# Altium PCB CT_V01.PcbDoc
Units mm, origin at the board's own origin, x right, y up, seen from the top; angles counter-clockwise.
Board outline 75 x 50 mm, 2 copper layers (Top Layer, Bottom Layer), stack 1.57 mm thick; 71 components, 48 nets, 226 pads, 77 vias.
Unrouted connection lines stored in the file: 61.
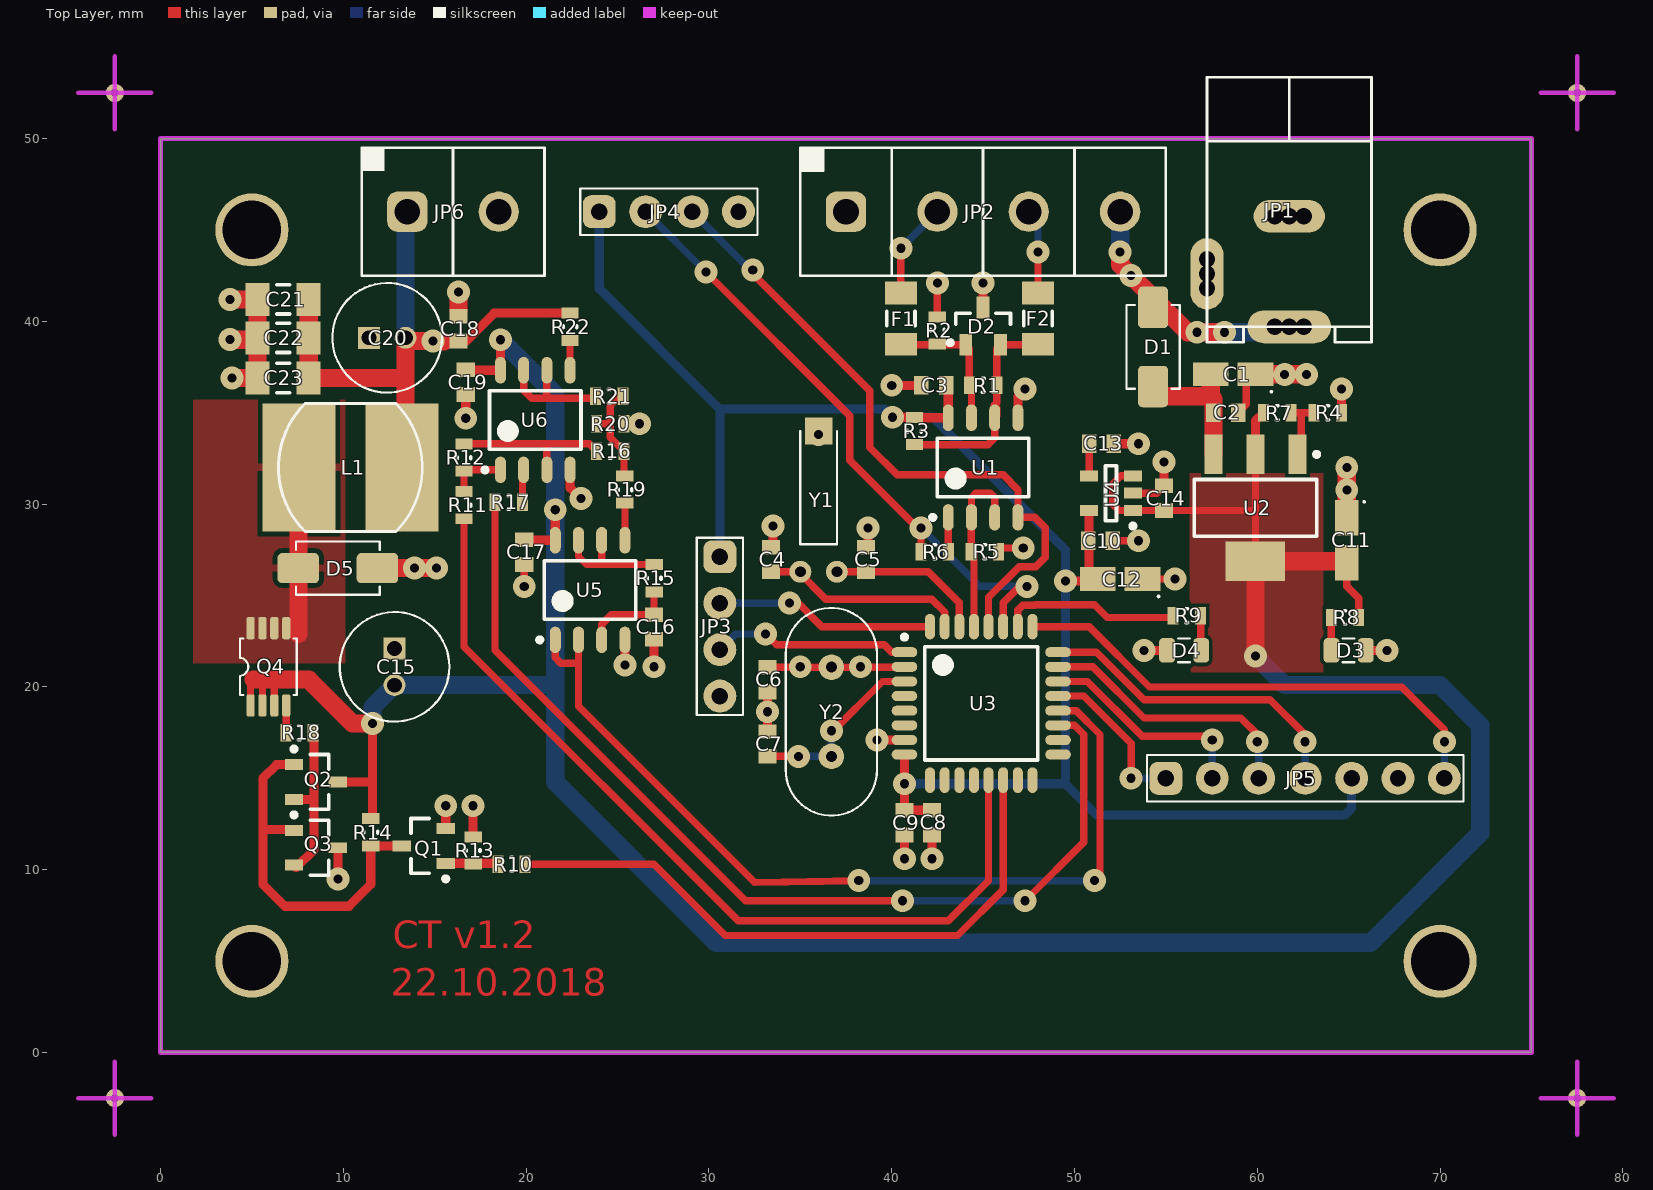
[diagram p0: Top Layer view]
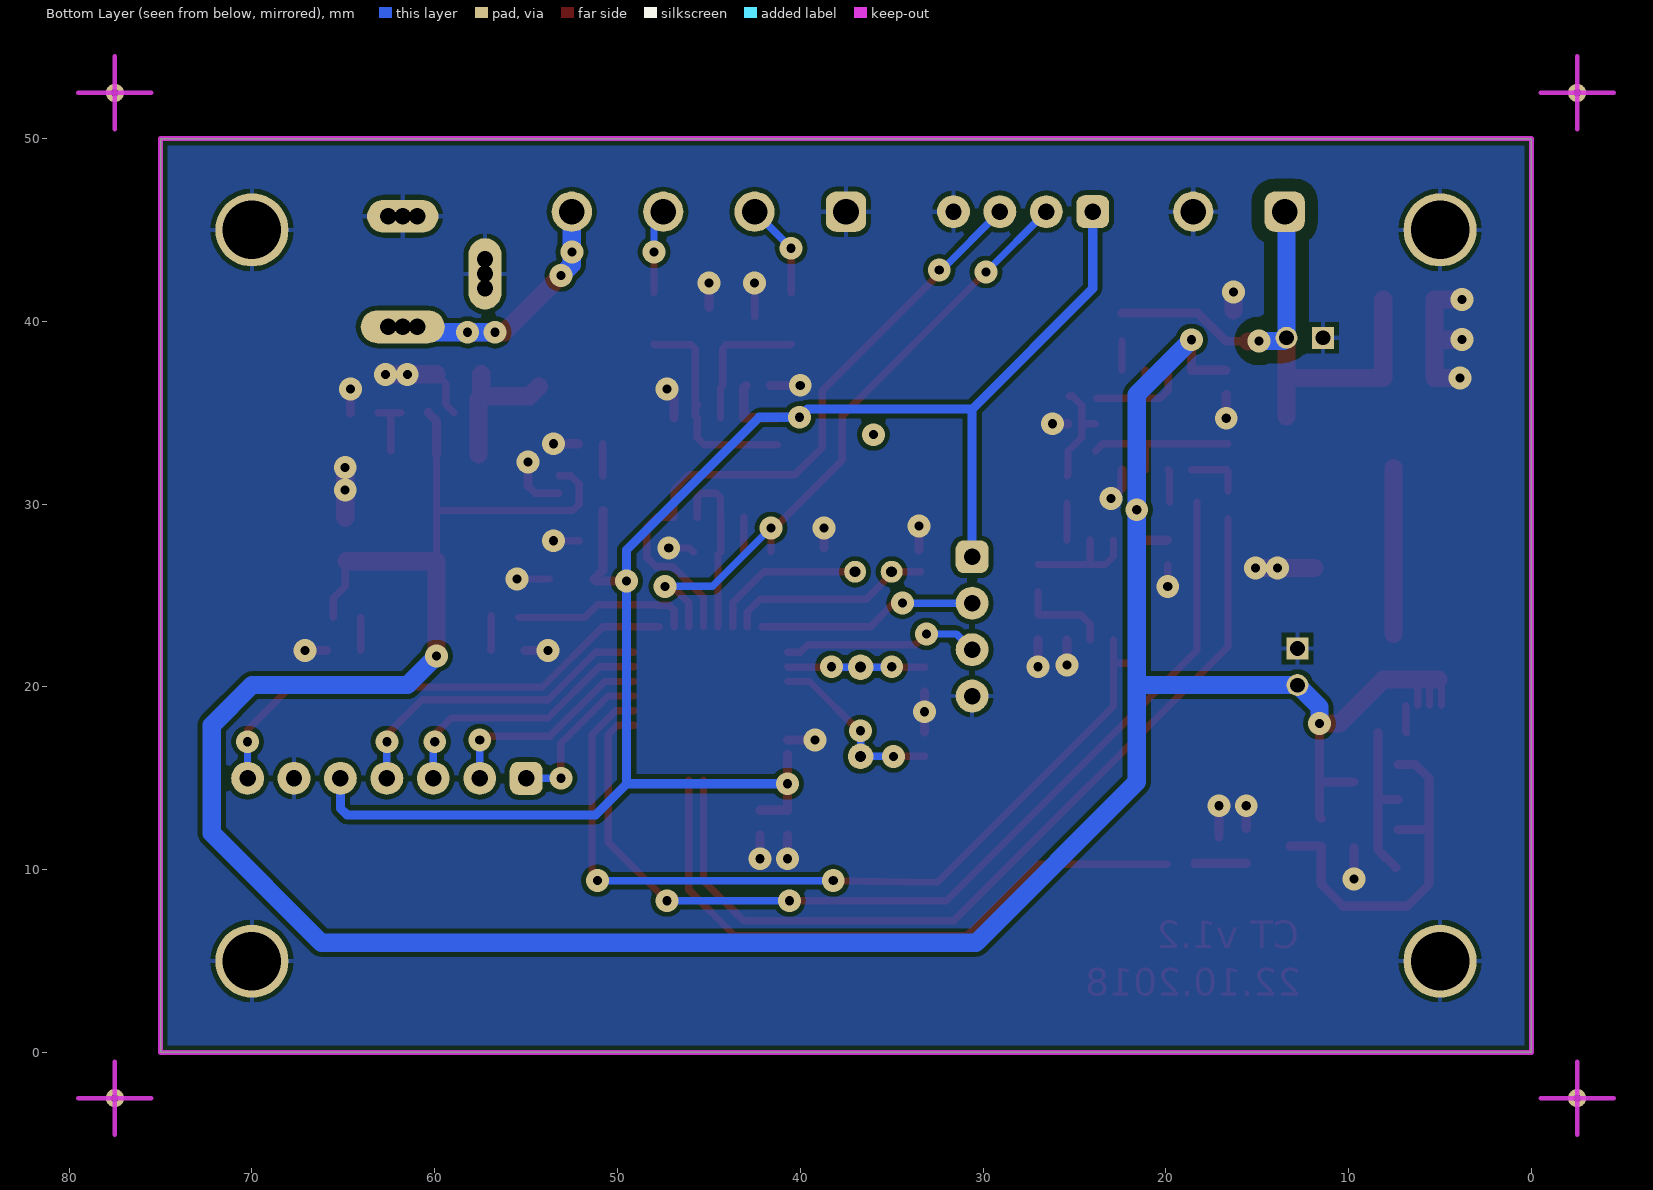
[diagram p1: Bottom Layer view, seen from below]

## Layer stack, top to bottom
Top Solder: solder mask 0.01, Solder Resist, Dk 3.5
Top Layer: signal copper 0.035
Dielectric 1: dielectric 1.5, FR-4, Dk 4.8
Bottom Layer: signal copper 0.035
Bottom Solder: solder mask 0.01, Solder Resist, Dk 3.5

## Board outline
0,0 75,0 75,50 0,50

## Design rules (kind name [scope] priority, off if disabled: settings)
Clearance Clearance_2 [InNamedPolygon('GND_B') vs InNet('NetC18_1')] p1: gap=0.7 ignorepadtopadclearanceinfootprint=FALSE
Clearance Clearance_1 [InNamedPolygon('GND_B')] p2: gap=0.254 ignorepadtopadclearanceinfootprint=FALSE except(0: Arc-Hole Track-Hole SMDPad-Hole THPad-Hole Via-Hole Fill-Hole Poly-Hole Region-Hole Text-Hole)
Clearance [All] p3: gap=0.2 ignorepadtopadclearanceinfootprint=FALSE
HoleSize [All] p1: absolutevalues=TRUE maxlimit=5 minlimit=0.025 maxpercent=80.000 minpercent=20.000
PlaneConnect [All] p1: planeconnectstyle=Relief reliefexpansion=0.5 reliefentries=4 reliefconductorwidth=0.3 reliefairgap=0.3
PolygonConnect PolygonConnect_6 [InComponent('U2') vs IsNamedPolygon('+6V')] p1: connectstyle=Direct reliefconductorwidth=0.254 reliefentries=4 polygonreliefangle="90 Angle" airgapwidth=0.254
PolygonConnect PolygonConnect_5 [IsVia vs IsNamedPolygon('+6V')] p2: connectstyle=Direct reliefconductorwidth=0.254 reliefentries=4 polygonreliefangle="90 Angle" airgapwidth=0.254
PolygonConnect PolygonConnect_4 [IsVia vs IsNamedPolygon('GND_B')] p3: connectstyle=Direct reliefconductorwidth=0.254 reliefentries=4 polygonreliefangle="90 Angle" airgapwidth=0.254
PolygonConnect PolygonConnect_3 [InComponent('D5') vs IsNamedPolygon('D5K')] p4: connectstyle=Relief reliefconductorwidth=0.4 reliefentries=4 polygonreliefangle="90 Angle" airgapwidth=0.25
PolygonConnect PolygonConnect_2 [InComponent('L1') vs IsNamedPolygon('D5K')] p5: connectstyle=Relief reliefconductorwidth=0.4 reliefentries=4 polygonreliefangle="90 Angle" airgapwidth=0.25
PolygonConnect PolygonConnect_1 [InComponent('Q4') vs IsNamedPolygon('D5K')] p6: connectstyle=Direct reliefconductorwidth=0.254 reliefentries=4 polygonreliefangle="90 Angle" airgapwidth=0.254
PolygonConnect [All] p7: connectstyle=Relief reliefconductorwidth=0.254 reliefentries=4 polygonreliefangle="90 Angle" airgapwidth=0.254
RoutingVias [All] p1: holewidth=0.711 width=1.27 viastyle="Through Hole" minholewidth=0.711 minwidth=1.27 maxholewidth=0.711 maxwidth=1.27
SolderMaskExpansion [All] p1: expansion=0.102
Width [All] p1: maxlimit=2 minlimit=0.2 preferedwidth=0.25
28 further rules are at their usual default settings.

## Components (designator, comment, footprint, x,y, rotation, side; value= is the part's Value field where it differs from the comment)
C1 "10u 16V" CAPMP3217X18N 58.675,37.1 r180 top
C2 "100n" CAPC1608X08N 58.275,35 r0 top
C3 "100n" CAPC1608X08N 42.3,36.5 r0 top
C4 "22p" CAPC1608X08N 33.4,26.975 r270 top
C5 "22p" CAPC1608X08N 38.6,26.975 r270 top
C6 "22p" CAPC1608X08N 33.2,20.4 r90 top
C7 "22p" CAPC1608X08N 33.2,16.875 r270 top
C8 "1u" CAPC1608X08N 42.2,12.575 r270 top
C9 "100n" CAPC1608X08N 40.7,12.575 r270 top
C10 "100n" CAPC1608X08N 51.425,28 r0 top
C11 "10u 16V" CAPMP3217X18N 64.9,28.025 r270 top
C12 "22uF 6V" CAPMP3217X18N 52.5,25.9 r180 top
C13 "100n" CAPC1608X08N 51.475,33.3 r0 top
C14 "100n" CAPC1608X08N 54.9,30.325 r90 top
C15 "100u 16V" CAPPRD200W50D600H1250 12.8,21.1 r270 top
C16 "100n" CAPC1608X08N 27,23.275 r270 top
C17 "100n" CAPC1608X08N 19.9,27.375 r90 top
C18 "100n" CAPC1608X08N 16.3,39.6 r90 top
C19 "100n" CAPC1608X08N 16.7,36.675 r90 top
C20 "100u 16V" CAPPRD200W50D600H1250 12.4,39.1 r0 top
C21 "22u" CAPC3216X14N 6.7,41.2 r180 top
C22 "22u" CAPC3216X14N 6.7,39.1 r180 top
C23 "22u" CAPC3216X14N 6.7,36.9 r180 top
D1 "SS14" DIOM521X260X241L114X145N 54.3,38.6 r90 top
D2 "SM712" SOT-23 45,39.734 r90 top
D3 "LED" LEDC200X125X80L40N 65,22 r180 top
D4 "LED" LEDC200X125X80L40N 56,22 r0 top
D5 "SS14" DIOM521X260X241L114X145N 9.7,26.5 r0 top
F1 "nanoSMDC012F" RESC3216X07N 40.5,40.15 r270 top
F2 "nanoSMDC012F" RESC3216X07N 48,40.15 r270 top
JP1 "POWER" DC-140-003 61.75,39.7 r0 top
JP2 "4 HEADER" TERMINAL4 45,46 r0 top
JP3 "Header 4" HDRV4W70P254_4X1_889X254H754 30.6,27.12 r270 top
JP4 "Header 4" HDRV4W70P254_4X1_889X254H754 24,46 r0 top
JP5 "LCD" HDRV7W70P254_7X1_1651X254H754 55,15 r0 top
JP6 "Header 2" TERMINAL2 16,46 r0 top
L1 "L*" SND-0705 7.575,32 r0 top
Q1 "BC847C" SOT95P245X110-3N 14.4,11.3 r180 top
Q2 "BC847" SOT95P245X110-3N 8.5,14.8 r0 top
Q3 "BC807" SOT95P245X110-3N 8.5,11.2 r0 top
Q4 "IRF7604" SOP8P65_300X490X110L53X30N 5.9,21.1 r0 top
R1 "nc" RESC1608X06N 45,36.5 r0 top
R2 "10k" RESC1608X06N 42.5,39.5 r90 top
R3 "10k" RESC1608X06N 41.25,34 r90 top
R4 "0" RESC1608X06N 63.85,35 r180 top
R5 "10k" RESC1608X06N 45.1,27.4 r180 top
R6 "2k2" RESC1608X06N 42.35,27.4 r0 top
R7 "nc" RESC1608X06N 61.1,35 r180 top
R8 "470" RESC1608X06N 64.8,23.8 r180 top
R9 "470" RESC1608X06N 56.15,23.9 r0 top
R10 "10k" RESC1608X06N 19.2,10.3 r0 top
R11 "1k" RESC1608X06N 16.6,29.95 r270 top
R12 "1M" RESC1608X06N 16.6,32.55 r270 top
R13 "10k" RESC1608X06N 17.1,11.05 r90 top
R14 "1k" RESC1608X06N 11.5,12.05 r90 top
R15 "0" RESC1608X06N 27,25.95 r270 top
R16 "22k" RESC1608X06N 24.6,32.9 r180 top
R17 "22k" RESC1608X06N 19.05,30.1 r0 top
R18 "100" RESC1608X06N 7.6,17.5 r0 top
R19 "22k" RESC1608X06N 25.4,30.8 r270 top
R20 "nc" RESC1608X06N 24.6,34.4 r0 top
R21 "0" RESC1608X06N 24.55,35.9 r0 top
R22 "1M" RESC1608X06N 22.4,39.7 r90 top
U1 "ADM3483" SOIC127P600X175-8N 45,32 r90 top
U2 "LD1117-3.3" SOT230P700X180-4N 59.9,29.8 r270 top
U3 "STM8L151K6T6" TQFP80P900X900X160-32N 44.9,19.1 r0 top
U4 "LP2981-3.3" SOT95P245X110-5N 52,30.6 r180 top
U5 "LM2904" SOIC127P600X175-8N 23.5,25.3 r90 top
U6 "LM2904" SOIC127P600X175-8N 20.5,34.6 r90 top
Y1 "32.768k" KX26 36,26.8 r180 top
Y2 "16M" XTAL_HC49P488W43L1117T475H350 36.7,18.64 r90 top

## Footprints (in the part's own frame and the unit in brackets; to place one, negate y for a bottom-side part, rotate by r counter-clockwise, add the part's x,y. Pads: shape width x height; smd on the part's side, far side on the other; paste and mask are expansions set on the pad)
CAPC1608X08N [mm] "Chip Capacitor, 2-Leads, Body 1,60x0,80mm, IPC Medium Density"
  rect 0.8x1 smd: 1(-0.675,0) 2(0.675,0)
  body extent -0.87,-0.48 0.87,0.47, height 0.85
CAPC3216X14N [mm] "Chip Capacitor, 2-Leads, Body 3,20x1,60mm, IPC Medium Density"
  rect 1.3x1.8 smd: 1(-1.4,0) 2(1.4,0)
  silkscreen extent -0.35,-0.8 0.35,0.8, body extent -1.7,-0.9 1.7,0.9, height 1.35
CAPMP3217X18N [mm] "Molded Capacitor, 2-Leads, Body 3,20x1,65mm, IPC Medium Density"
  rect 1.95x1.3 smd: 1(-1.225,0) 2(1.225,0)
  silkscreen extent -2.15,0.9 -2.05,1, body extent -1.7,-0.9 1.7,0.9, height 1.8
CAPPRD200W50D600H1250 [mm] "Capacitor, Polarized, Radial (Electrolytic); 2.00 mm C X 6.00 mm Dia X 12.50 mm H body"
  rect 1.2x1.2 hole 0.8 paste-1.2: 1(-1,0)
  round 1.2 hole 0.8 paste-1.2: 2(1,0)
  silkscreen extent -3,-3 3,3, body extent -3,-3 3.01,3, height 12.51
DC-140-003 [mm]
  oval 4.6x1.8 hole 0.9: 1(0,0)
  oval 3.9x1.8 hole 0.9: 2(0,6.05)
  oval 1.8x3.9 hole 0.9: 3(-4.5,2.9)
  silkscreen extent -4.5,-0.85 4.5,13.65
DIOM521X260X241L114X145N [mm] "Diode, Molded Body; 4.315 mm L X 2.605 mm W X 2.41 mm H body"
  rrect30% 2.27x1.65 smd: A(2.165,0) K(-2.165,0)
  silkscreen extent -2.29,-1.46 2.29,1.46, body extent -2.61,-1.3 2.61,1.3, height 2.41
HDRV4W70P254_4X1_889X254H754 [mm] "Header, Vertical, 2.54 mm pitch; 0.70 mm lead width, 4 pins, 1 row, 4 pins per row, 8.89 mm L X 2.54 mm W X 7.54 mm H body"
  rrect50% 1.8x1.8 hole 0.9 paste-1.71: 1(0,0)
  round 1.8 hole 0.9 paste-1.71: 2(2.54,0) 3(5.08,0) 4(7.62,0)
  silkscreen extent -1.04,-1.27 8.66,1.27, body extent -0.64,-1.27 8.25,1.27, height 7.54
HDRV7W70P254_7X1_1651X254H754 [mm] "Header, Vertical, 2.54 mm pitch; 0.70 mm lead width, 7 pins, 1 row, 7 pins per row, 16.51 mm L X 2.54 mm W X 7.54 mm H body"
  rrect50% 1.8x1.8 hole 0.9 paste-1.71: 1(0,0)
  round 1.8 hole 0.9 paste-1.71: 2(2.54,0) 3(5.08,0) 4(7.62,0) 5(10.16,0) 6(12.7,0) 7(15.24,0)
  silkscreen extent -1.04,-1.27 16.28,1.27, body extent -0.64,-1.27 15.88,1.27, height 7.54
KX26 [mm] "clock crystal, 2*6 mm"
  rect 1.5x1.5 smd: 0(0,-7.2)
  round 1.2 hole 0.6: 1(-1,0.5) 2(1,0.5)
  silkscreen extent -1,-7.2 1,-1, body extent -1,-7.2 1,-1, height 0.99
LEDC200X125X80L40N [mm] "LED, Chip; 2.00 mm L X 1.25 mm W X 0.80 mm H body"
  rrect51% 0.86x1.35 smd: A(0.935,0) K(-0.935,0)
  silkscreen extent -0.33,-0.65 0.33,0.65, body extent -1,-0.63 1,0.63, height 0.25
RESC1608X06N [mm] "Chip Resistor, 2-Leads, Body 1,60x0,82mm, IPC Medium Density"
  rect 0.6x0.95 smd: 1(-0.75,0) 2(0.75,0)
  silkscreen extent -0.05,-0.38 0.05,0.38, body extent -0.85,-0.48 0.85,0.48, height 0.6
RESC3216X07N [mm] "Chip Resistor, 2-Leads, Body 3,20x1,60mm, IPC Medium Density"
  rect 1.25x1.75 smd: 1(-1.4,0) 2(1.4,0)
  silkscreen extent -0.4,-0.77 0.4,0.77, body extent -1.68,-0.87 1.68,0.87, height 0.71
SND-0705 [mm]
  rect 4x7 smd: 1(0,0) 2(5.625,0)
  silkscreen extent -1.12,-3.5 6.75,3.5
SOIC127P600X175-8N [mm] "SOIC, 8-Leads, Body 4,90x3,90mm, Pitch 1,27mm, IPC Medium Density"
  oval 1.45x0.6 smd: 1(-2.725,1.905) 2(-2.725,0.635) 3(-2.725,-0.635) 4(-2.725,-1.905) 5(2.725,-1.905) 6(2.725,-0.635) 7(2.725,0.635) 8(2.725,1.905)
  silkscreen extent -2.85,-2.5 1.6,2.88, body extent -3,-2.5 3,2.5, height 1.75
SOP8P65_300X490X110L53X30N [mm] "Small Outline Pkg (SOP), 0.65 mm pitch; 8 pin, 3.00 mm L X 3.00 mm W X 1.10 mm H body"
  rrect49% 0.45x1.22 smd: 1(-0.975,-2.115) 2(-0.325,-2.115) 3(0.325,-2.115) 4(0.975,-2.115) 5(0.975,2.115) 6(0.325,2.115) 7(-0.325,2.115) 8(-0.975,2.115)
  silkscreen extent -1.55,-1.55 1.55,1.55, body extent -1.5,-2.45 1.5,2.45, height 1.1
SOT95P245X110-3N [mm] "SOT23, 3-Leads, Body 2,90x2,45mm, Pitch 0,95mm, IPC Medium Density"
  rect 1x0.6 smd: 1(-1.2,0.95) 2(1.2,0) 3(-1.2,-0.95)
  silkscreen extent -1.33,-1.5 0.7,1.92, body extent -0.7,-1.5 0.7,1.5, height 1.1
SOT95P245X110-5N [mm] "SOT23, 5-Leads, Body 2,90x2,45mm, Pitch 0,95mm, IPC Medium Density"
  rect 1x0.6 smd: 1(-1.2,0.95) 2(-1.2,0) 3(-1.2,-0.95) 4(1.2,-0.95) 5(1.2,0.95)
  silkscreen extent -1.33,-1.5 0.3,1.92, body extent -0.7,-1.5 0.7,1.5, height 1.1
SOT230P700X180-4N [mm] "SOT223, 4-Leads, Body 6,50x7,00mm (avg), Pitch 2,30mm, IPC Medium Density"
  rect 2.15x1 smd: 1(-2.925,2.3) 2(-2.925,0) 3(-2.925,-2.3)
  rect 2.15x3.25 smd: 4(2.925,0)
  silkscreen extent -3.05,-3.35 1.55,3.48, body extent -1.85,-3.35 1.85,3.35, height 1.8
SOT-23 [mm] "SOT23, 3-Leads, Body 2.9x1.3mm, Pitch 0.95mm, Lead Span 2.5mm, IPC High Density"
  rect 1.2x0.7 smd: 1(-1.016,0.95) 2(1.016,0) 3(-1.016,-0.95)
  silkscreen extent -1.02,-1.5 0.7,1.92, body extent -0.7,-1.5 0.7,1.5, height 1.1
TERMINAL2 [mm]
  rrect50% 2.2x2.2 hole 1.4: 1(-2.5,0)
  round 2.2 hole 1.4: 2(2.5,0)
  silkscreen extent -5,-3.5 5,3.5
TERMINAL4 [mm]
  rrect50% 2.2x2.2 hole 1.4: 1(-7.5,0)
  round 2.2 hole 1.4: 2(-2.5,0) 3(2.5,0) 4(7.5,0)
  silkscreen extent -10,-3.5 10,3.5
TQFP80P900X900X160-32N [mm] "TQFP, 32-Leads, Body 7,00x7,00mm, Pitch 0,80mm, IPC Medium Density"
  oval 1.4x0.55 smd: 1(-4.2,2.8) 2(-4.2,2) 3(-4.2,1.2) 4(-4.2,0.4) 5(-4.2,-0.4) 6(-4.2,-1.2) 7(-4.2,-2) 8(-4.2,-2.8) 17(4.2,-2.8) 18(4.2,-2) 19(4.2,-1.2) 20(4.2,-0.4) 21(4.2,0.4) 22(4.2,1.2) 23(4.2,2) 24(4.2,2.8)
  oval 0.55x1.4 smd: 9(-2.8,-4.2) 10(-2,-4.2) 11(-1.2,-4.2) 12(-0.4,-4.2) 13(0.4,-4.2) 14(1.2,-4.2) 15(2,-4.2) 16(2.8,-4.2) 25(2.8,4.2) 26(2,4.2) 27(1.2,4.2) 28(0.4,4.2) 29(-0.4,4.2) 30(-1.2,4.2) 31(-2,4.2) 32(-2.8,4.2)
  silkscreen extent -4.32,-3.1 3.1,3.75, body extent -3.5,-3.5 3.5,3.5, height 1.6
XTAL_HC49P488W43L1117T475H350 [mm] "Crystal, HC-49; 4.88 mm C X 0.43 mm W 11.175 mm L X 4.75 mm T X 3.50 mm H body"
  round 1.4 hole 0.6 paste-1.06: 1(-2.44,0) 2(2.44,0)
  silkscreen extent -5.68,-2.5 5.68,2.5, body extent -5.59,-2.37 5.59,2.37, height 3.5

## Part data
C1 C11 C12: library part CAPP
  C1 C11: Вид=Конденсатор, Корпус==Footprint, Тип="10u 16V"
C2 C3 C4 C5 C6 C7 C8 C9 C10 C13 C14 C16 C17 C18 C19 C21 C22 C23: library part CAPN
  C2: Вид=Конденсатор, Корпус==Footprint, Тип=100n
C15 C20: library part C-EL-DIP
D1 D5: library part "DIODE SCHOTTKY", Text Field1=30, Text Field2=20
F1 F2: library part VARISTOR, =Tyco
JP2: "4 Pin Header"
JP3 JP4: "Header, 4-Pin", LatestRevisionDate=17-Jul-2002, LatestRevisionNote="Re-released for DXP Platform.", Publisher="Altium Limited"
JP5: library part "Header 7", "Header, 7-Pin", LatestRevisionDate=17-Jul-2002, LatestRevisionNote="Re-released for DXP Platform.", Publisher="Altium Limited"
JP6: "Header, 2-Pin", LatestRevisionDate=17-Jul-2002, LatestRevisionNote="Re-released for DXP Platform.", Publisher="Altium Limited"
Q1 Q2: library part NPN
Q3: library part PNP
Q4: library part MOSFET_P_8pins
R1 R2 R3 R4 R5 R6 R7 R8 R9 R10 R11 R12 R13 R14 R15 R16 R17 R18 R19 R20 R21 R22: library part RES
  R4: Вид=Резистор, Корпус==Footprint, Тип=0
  R7: Вид=Резистор, Корпус==Footprint, Тип=nc
U1: library part SN65HVD12DG4
U2: library part LM1117_3.3, Вид=Мікросхема, Корпус==Footprint, Тип=LD1117-3.3
U5 U6: "2 Operation amplifier"
Y1 Y2: library part XTAL, "Crystal Oscillator", LatestRevisionDate=17-Jul-2002, LatestRevisionNote="Re-released for DXP Platform.", PackageDescription="Crystal, Thru-Hole; 2 Leads; Body 3.1 x 8.2 mm (Dia.xH)", PackageReference=R38, Published=8-Jun-2000, Publisher="Altium Limited"

## Free pads (board coordinates)
  round 4 hole 3.2: 0(5,5) 0(5,45) 0(70,5) 0(70,45)
  round 1 hole 0.4: 2(-2.5,52.5) 3(77.5,52.5) 4(-2.5,-2.5) 5(77.5,-2.5)

## Via types
v1: diameter 1.25, hole 0.5, Top Layer to Bottom Layer, 71 vias
v2: diameter 1, hole 0.9, Top Layer to Bottom Layer, 6 vias

## Nets (pads, with @x,y where several pads share a name; then routed paths per layer and width w, separated by ;. In a path a pad name is that pad's centre, name@x,y a point inside that pad or via, vN(x,y) a via of type N, cw(c..) or ccw(c..) an arc to the next point about the centre after c; other vN are vias at no path point)
+3V3: C3.2 C8.1 C9.1 C10.1 C12.2 JP3.1 JP4.1 JP5.5 R3.2 U1.8 U3.8 U4.5 | length 98.7
  Top Layer w0.5: v1(40.05,34.75) R3.2 41.275,34.725 U1.8 43.095,36.38 C3.2 ; U3.8 v1(40.7,14.7) C9.1 C8.1 ; v1(49.5,25.8) 51.175,25.8 C12.2 50.8,26.375 U4.5 U4.5@50.75,29.6
  Bottom Layer w0.5: JP4.1 24,41.8 30.6,35.2 ; JP3.1 30.6,35.2 ; v1(40.7,14.7) 49.5,14.7 ; JP5.5 65.16,13.36 64.8,13 51.2,13 49.5,14.7 ; 30.6,35.2 39.6,35.2 v1(40.05,34.75) 42.25,34.75 49.5,27.5 v1(49.5,25.8) 49.5,14.7
+6V: C11.2 C14.1 C15.2 C17.2 C19.2 Q2.2 Q4.1 Q4.2 Q4.3 R7.2 R8.1 R14.2 U2.2 U2.4 U4.1 U4.3 U5.8 U6.8 | length 174.6
  Top Layer w0.25: 4.925,20.225 5.1,20.4 5.575,19.925 ; 6.2,20.4 6.225,20.375
  Top Layer w0.4: Q4.1 4.925,20.225 ; Q4.2 5.575,19.925 ; Q4.3 6.225,20.375 ; C19.2 C19.2@16.725,37.325 ; C17.2 C17.2@19.925,28.025 ; v1(21.595,29.695) v1@21.6,29.7 ; U4.3 52.55,31.55 52.1,31.1 52.1,30 52.45,29.65 U4.1 C14.1 59.85,29.65 59.9,29.7 ; U2.4 59.9,29.7 ; U2.2 59.9,29.7 ; C11.2@64.825,26.875 C11.2 64.9,25.5 65.55,24.85 R8.1
  Top Layer w0.5: Q2.2 11.6,14.8 v1(11.6,18) 11.6,12.9 R14.2 ; C19.2@16.725,37.325 U6.8 v1(18.595,38.995) ; C17.2@19.925,28.025 U5.8 v1(21.595,29.695) ; U2.2 59.9,34.55 R7.2
  Top Layer w1: 5.1,20.4 6.2,20.4 8.1,20.4 10.5,18 v1(11.6,18) ; v1(59.9,21.7) U2.4 C11.2@64.825,26.875
  Bottom Layer w1: v1(11.6,18) 11.6,18.9 C15.2 21.4,20.1 ; v1(18.595,38.995) 21.595,35.995 v1(21.595,29.695) 21.595,14.8 30.395,6 66.2,6 72.2,12 72.2,17.9 70,20.1 61.5,20.1 v1(59.9,21.7)
A0: JP5.1 U3.21 | length 8.9
  Top Layer w0.4: U3.21 50.5,19.5 53.1,16.9 v1(53.1,15)
  Bottom Layer w0.4: v1(53.1,15) JP5.1
ADC: U3.20 U5.1 U5.2 | length 49.2
  Top Layer w0.4: U5.1 21.595,21.605 21.9,21.3 22.865,21.3 ; U5.2 22.865,21.3 ; v1(38.2,9.4) 32.5,9.3 22.865,18.935 22.865,21.3 ; U3.20 50.1,18.7 51.4,17.4 51.4,9.7 v1(51.1,9.4)
  Bottom Layer w0.4: v1(38.2,9.4) v1(51.1,9.4)
COMP_OUT: R11.2 U3.13 | length 48.3
  Top Layer w0.4: R11.2 16.6,22.2 31.6,7.2 43.1,7.2 45.3,9.4 U3.13
CS: JP5.2 U3.22 | length 11.8
  Top Layer w0.4: U3.22 50.7,20.3 53.7,17.3 v1@57.54,17.3
  Bottom Layer w0.4: JP5.2 v1(57.54,17.1)
DAC: R17.1 U3.19 | length 54.7
  Top Layer w0.4: R17.1 18.3,22 32,8.3 v1(40.6,8.3) ; v1@47.4,8.4 50.5,11.5 50.5,17.4 50,17.9 U3.19
  Bottom Layer w0.4: v1(40.6,8.3) v1(47.3,8.3)
DE: R5.2 U1.2 U1.3 U3.29 | length 9.7
  Top Layer w0.4: U3.29 44.5,27.25 R5.2 44.35,29.26 U1.2 44.365,30.365 44.6,30.6 45.4,30.6 45.635,30.365 U1.3
GND: C1.1 C2.2 C3.1 C4.1 C5.1 C6.1 C7.1 C8.2 C9.2 C10.2 C11.1 C12.1 C13.2 C14.2 C15.1 C16.2 C17.1 C18.2 C19.1 C20.1 C21.2 C22.2 C23.2 D2.2 D3.K D4.K D5.A JP1.2 JP1.3 JP2.1 JP3.4 JP4.4 JP5.6 JP6.2 pad.0 Q1.3 Q3.2 R2.2 R4.1 R5.1 R13.2 R20.2 U1.5 U3.7 U4.2 U5.4 U6.4 | length 62.8
  Top Layer w0.4: v1(19.9,25.5) C17.1 ; v1(33.5,28.8) 33.65,28.8 v1@33.5,28.95 ; v1@38.7,28.75 38.85,28.9 v1@38.7,29.05 ; R2.2 v1(42.5,42.1) ; R5.1 46.05,27.6 v1(47.2,27.6) ; C10.2 v1(53.5,28) ; U4.2 54.5,30.6 C14.2 ; C12.1 v1(55.5,25.9) ; C2.2 59.4,35.45 59.4,36.6 C1.1
  Top Layer w0.5: v1(9.7,9.5) Q3.2 ; Q1.3 v1(15.6,13.5) ; v1(16.7,34.7) C19.1 ; R13.2 v1(17.1,13.5) ; U6.4 22.405,30.895 v1(23,30.3) ; R20.2 v1(26.2,34.4) ; v1(25.405,21.205) U5.4 ; v1(27,21.1) C16.2 ; C7.1 C6.1 ; C4.1@33.5,27.5 v1@33.5,28.95 ; C5.1@38.7,27.6 v1@38.7,29.05 ; v1(39.2,17.1) U3.7 ; v1(40,36.5) C3.1 ; v1(40.7,10.6) C9.2 ; v1(42.2,10.6) C8.2 ; D2.2 v1(45,42.1) ; U1.5 46.905,35.905 v1(47.3,36.3) ; C13.2 v1(53.5,33.3) ; v1(53.8,22) D4.K ; C14.2 v1(54.9,32.3) ; R4.1 v1(64.6,36.3) ; D3.K v1(67.1,22)
  Top Layer w1: v1(3.8,39) 5.2,39 C22.2 ; v1(3.9,36.9) C23.2 C22.2 ; v1@4,41.2 C21.2 C22.2 ; D5.A v1(15.1,26.5) ; C18.2@16.3,40.6 v1@16.3,41.5 ; C1.1 v1(62.7,37.1) ; C11.1 v1(64.9,32)
  other v1: 33.2,18.638 13.9,26.5 38.7,28.7 64.9,30.775 61.5,37.1 3.8,41.2 16.3,41.6
  other v2: 57.25,41.8 57.25,43.4 60.95,45.75 62.55,45.75
LED: R9.1 U3.26 | length 9.8
  Top Layer w0.4: U3.26 46.9,24.2 47.175,24.475 47.825,24.475 47.85,24.5 51.1,24.5 51.8,23.8 R9.1@55.4,23.8
NetC1_2: C1.2 C2.1 D1.K U2.3 | length 7.8
  Top Layer w1: D1.K 54.835,35.9 57.45,35.9 ; C1.2 57.45,35.9 ; U2.3 C2.1 57.6,35.75 57.45,35.9
NetC4_2: C4.2 U3.31 Y1.2 | length 11.2
  Top Layer w0.4: C4.2 34.9,26.3 36.4,24.8 42.2,24.8 42.9,24.1 U3.31
NetC5_2: C5.2 U3.30 Y1.1 | length 8.7
  Top Layer w0.4: Y1.1 C5.2 42,26.3 43.7,24.6 U3.30
NetC6_2: C6.2 U3.2 Y2.2 | length 10.8
  Top Layer w0.4: C6.2 40.675,21.075 U3.2
  Bottom Layer w0.25: v1@38.28,21.08 v1(38.3,21.1)
  Bottom Layer w0.4: v1@35,21.08 Y2.2 v1@38.28,21.08
  other v1: 35,21.1
NetC7_2: C7.2 U3.3 Y2.1 | length 10
  Top Layer w0.4: C7.2 v1(34.9,16.2) ; v1@36.7,17.5 39.5,20.3 U3.3
  Bottom Layer w0.4: v1(34.9,16.2) Y2.1 v1@36.7,17.5
  other v1: 36.7,17.6
NetC13_1: C13.1 U4.4 | length 1.8
  Top Layer w0.4: U4.4 C13.1
NetC16_1: C16.1 R15.2 U5.3 | length 5.2
  Top Layer w0.4: U5.3 24.135,23.435 24.65,23.95 C16.1 R15.2
NetC18_1: C18.1 C20.2 C21.1 C22.1 C23.1 JP6.1 L1.2 R22.2 | length 31.9
  Top Layer w0.4: JP6.1@13.4,45.9 JP6.1
  Top Layer w0.5: v1@15.5,38.9 16.725,38.925 18.25,40.45 R22.2
  Top Layer w1: C21.1 C22.1 C23.1 13.4,36.9 ; L1.2@13.4,34.8 13.4,36.9 ; v1@15.5,38.9 v1(14.913,38.925) 13.4,38.925 13.4,36.9
  Bottom Layer w1: JP6.1@13.4,45.9 C20.2 13.575,38.925 v1(14.913,38.925)
NetD2_1: D2.1 F1.2 R1.1 R2.1 U1.7 | length 7.7
  Top Layer w0.4: F1.2 40.532,38.718 D2.1 44.25,38.518 R1.1 44.365,36.385 U1.7
NetD2_3: D2.3 F2.2 R1.2 R3.1 U1.6 | length 11.9
  Top Layer w0.4: R3.1 45.25,33.25 45.635,33.635 U1.6 45.75,34.84 45.75,35.255 45.6,35.405 45.75,35.555 R1.2 45.75,38.518 D2.3 47.968,38.718 F2.2
NetD3_A: D3.A R8.2 | length 1.8
  Top Layer w0.4: R8.2 64.05,22.015 D3.A
NetD4_A: D4.A R9.2 | length 1.9
  Top Layer w0.4: R9.2 56.9,22.035 D4.A
NetD5_K: D5.K L1.1 Q4.5 Q4.6 Q4.7 Q4.8 | length 9.1
  Top Layer w0.4: L1.1@7.55,31.975 L1.1
  Top Layer w1: 7.55,22.9 L1.1@7.55,31.975
NetF1_1: F1.1 JP2.2 | length 5.3
  Top Layer w0.4: F1.1 v1(40.5,44)
  Bottom Layer w0.4: v1(40.5,44) JP2.2
NetF2_1: F2.1 JP2.3 | length 4.7
  Top Layer w0.4: F2.1 v1(48,43.8)
  Bottom Layer w0.4: JP2.3 48,45.5 v1(48,43.8)
NetJP3_3: JP3.3 U3.1 | length 11.1
  Top Layer w0.4: JP3.3 JP3.3@30.74,21.9 ; v1(33.1,22.9) 33.7,22.3 39.6,22.3 40,21.9 U3.1
  Bottom Layer w0.4: JP3.3 31.46,22.9 v1(33.1,22.9)
NetQ1_1: Q1.1 R10.1 R13.1 | length 2.9
  Top Layer w0.4: R10.1@18.4,10.35 R10.1
  Top Layer w0.5: Q1.1 R10.1@18.4,10.35
NetQ1_2: Q1.2 Q2.1 Q3.1 R14.1 | length 20.3
  Top Layer w0.4: Q2.1 Q2.1@7.35,15.75
  Top Layer w0.5: Q3.1@7.3,12.2 5.6,12.2 ; Q2.1 6.35,15.75 5.6,15 5.6,12.2 ; Q1.2 R14.1 11.5,9.2 10.3,8 6.8,8 5.6,9.2 5.6,12.2
NetQ2_3: Q2.3 Q3.3 R18.2 | length 8.9
  Top Layer w0.5: Q2.3 8.35,13.85 8.4,13.9 ; Q3.3@7.425,10.125 8.4,11.1 8.4,13.9 ; R18.2@8.4,17.5 8.4,13.9
NetQ4_4: Q4.4 R18.1 | length 1.5
  Top Layer w0.4: R18.1 6.875,17.525 Q4.4
NetR4_2: R4.2 R7.1 U2.1 | length 3.3
  Top Layer w0.4: R7.1 62.4,35 ; U2.1@62.4,32.925 62.4,35 ; R4.2 62.4,35
NetR6_2: R6.2 U1.1 | length 1.9
  Top Layer w0.4: U1.1 43.1,29.27 R6.2
NetR11_1: R11.1 R12.2 U6.1 | length 3.1
  Top Layer w0.4: R11.1 R12.2 16.675,31.875 U6.1
NetR12_1: R12.1 R16.2 U6.3 | length 8.6
  Top Layer w0.4: R12.1 23.45,33.3 R16.2 ; U6.3 21.135,33.1
NetR15_1: R15.1 U5.6 U5.7 | length 6.5
  Top Layer w0.4: U5.7 22.865,27.135 23.3,26.7 24.1,26.7 ; U5.6 24.135,26.735 24.1,26.7 ; R15.1 24.1,26.7
NetR16_1: R16.1 R19.1 R20.1 R21.2 | length 5.8
  Top Layer w0.4: R20.1 24.6,34.4 ; R21.2 25.1,35.9 24.6,35.4 24.6,34.4 ; R19.1 25.35,31.6 R16.1 24.6,33.65 24.6,34.4
NetR17_2: R17.2 U6.2 | length 1.8
  Top Layer w0.4: R17.2 19.8,31.81 U6.2
NetR19_2: R19.2 U5.5 | length 2
  Top Layer w0.25: R19.2 R19.2@25.405,30.045
  Top Layer w0.4: U5.5 R19.2@25.405,30.045
NetR21_1: R21.1 U6.6 U6.7 | length 6.8
  Top Layer w0.4: U6.7 19.865,36.235 20.3,35.8 21.2,35.8 ; U6.6 21.135,35.865 21.2,35.8 ; R21.1@23.8,35.8 21.2,35.8
NetR22_1: R22.1 U6.5 | length 1.6
  Top Layer w0.4: U6.5 R22.1@22.405,38.95
PULSE: R10.2 U3.14 | length 34.8
  Top Layer w0.4: R10.2 27,10.3 30.9,6.4 43.6,6.4 46.1,8.9 U3.14
RESETLCD: JP5.7 U3.25 | length 27.5
  Top Layer w0.4: U3.25 50.8,23.3 54.1,20 67.9,20 70.24,17.66 v1(70.24,17)
  Bottom Layer w0.4: JP5.7 v1(70.24,17)
RXD0: JP4.2 R6.1 U3.27 | length 35.3
  Top Layer w0.4: v1(29.84,42.7) 37.7,34.84 37.7,32.4 41.5,28.6 v1@41.6,28.5 ; R6.1 v1@41.6,28.5 ; v1(41.6,28.7) v1@41.6,28.5 ; v1@41.7,28.6 v1@41.6,28.5 ; U3.27 46.1,24.6 47,25.5 v1(47.4,25.5)
  Bottom Layer w0.4: JP4.2 v1(29.84,42.7) ; v1(41.6,28.7) 44.8,25.5 v1(47.4,25.5)
SCLK: JP5.4 U3.24 | length 18.3
  Top Layer w0.4: U3.24 51.2,21.9 53.8,19.3 60.7,19.3 62.62,17.38 v1(62.62,17)
  Bottom Layer w0.25: v1(62.62,17) v1@62.62,17.28
  Bottom Layer w0.4: JP5.4 v1@62.62,17.28
SDATA: JP5.3 U3.23 | length 15
  Top Layer w0.4: U3.23 51,21.1 53.8,18.3 59.1,18.3 v1@60.08,17.32
  Bottom Layer w0.25: v1(60,17) 60,17.14 v1@60.08,17.22
  Bottom Layer w0.4: JP5.3 v1@60.08,17.22
SWIM: JP3.2 U3.32 | length 12
  Top Layer w0.4: v1@34.4,24.58 34.9,24.58 36.18,23.3 U3.32
  Bottom Layer w0.25: v1@34.38,24.58 v1(34.4,24.6)
  Bottom Layer w0.4: JP3.2 v1@34.38,24.58
TXD0: JP4.3 U1.4 U3.28 | length 36.5
  Top Layer w0.4: v1@32.34,42.74 32.34,42.66 38.8,36.2 38.8,33.1 40.3,31.6 46.1,31.6 46.905,30.795 U1.4 47.825,29.275 48.4,28.7 48.4,27.1 47.875,26.575 46.975,26.575 45.3,24.9 U3.28
  Bottom Layer w0.25: v1@32.28,42.8 v1(32.4,42.8)
  Bottom Layer w0.4: JP4.3 v1@32.28,42.8
V_IN: D1.A JP1.1 JP2.4 | length 16.9
  Top Layer w1: v1(52.5,43.8) 52.5,43.1 56.2,39.4 v1(56.7,39.4) v1(58.2,39.4)
  Bottom Layer w0.25: JP1.1@61.45,39.4 JP1.1
  Bottom Layer w1: JP2.4 v1(52.5,43.8) 52.5,43.1 v1(53.1,42.5) ; v1(56.7,39.4) v1(58.2,39.4) JP1.1@61.45,39.4
  other v2: 60.95,39.7 62.55,39.7
pads on no net: U3.4 U3.5 U3.6 U3.9 U3.10 U3.11 U3.12 U3.15 U3.16 U3.17 U3.18 Y1.0
copper on no net:
  other v1: 36,33.8

## Polygon pours and split planes (outlines as drawn)
NetD5_K on Top Layer "D5K" (solid, remove dead copper, pour order 0): 1.8,21.3 10.1,21.3 10.1,35.7 1.8,35.7
+6V on Top Layer "+6V" (solid, remove dead copper, pour order 6): 56.3,31.7 56.3,20.8 63.6,20.8 63.6,31.7
GND on Bottom Layer "GND_B" (solid, remove dead copper, pour order 4): 0,0 75,0 75,50 0,50

## Keep-outs
Keep-Out Layer:
  lines w0.254: -4.5,-2.5 -0.5,-2.5 ; -4.5,52.5 -0.5,52.5 ; -2.5,-4.5 -2.5,-2.5 -2.5,-0.5 ; -2.5,50.5 -2.5,54.5 ; 75.5,-2.5 77.5,-2.5 ; 75.5,52.5 77.5,52.5 ; 77.5,-4.5 77.5,-2.5 ; 77.5,-0.5 77.5,-2.5 ; 77.5,50.5 77.5,52.5 ; 77.5,54.5 77.5,52.5 ; 79.5,-2.5 77.5,-2.5 ; 79.5,52.5 77.5,52.5 ; 0,0 0,50 75,50 75,0 0,0

## Other copper
Top Layer:
  text "CT v1.2" at 12.7,5.7 h1.5
  text "22.10.2018" at 12.6,3.1 h1.5